# Altium PCB NSKPD.PcbDoc
Units mil, origin at the board's own origin, x right, y up, seen from the top; angles counter-clockwise.
Board outline 4921.26 x 1771.65 mil, 2 copper layers (Top Layer, Bottom Layer); 70 components, 100 nets, 280 pads, 59 vias.
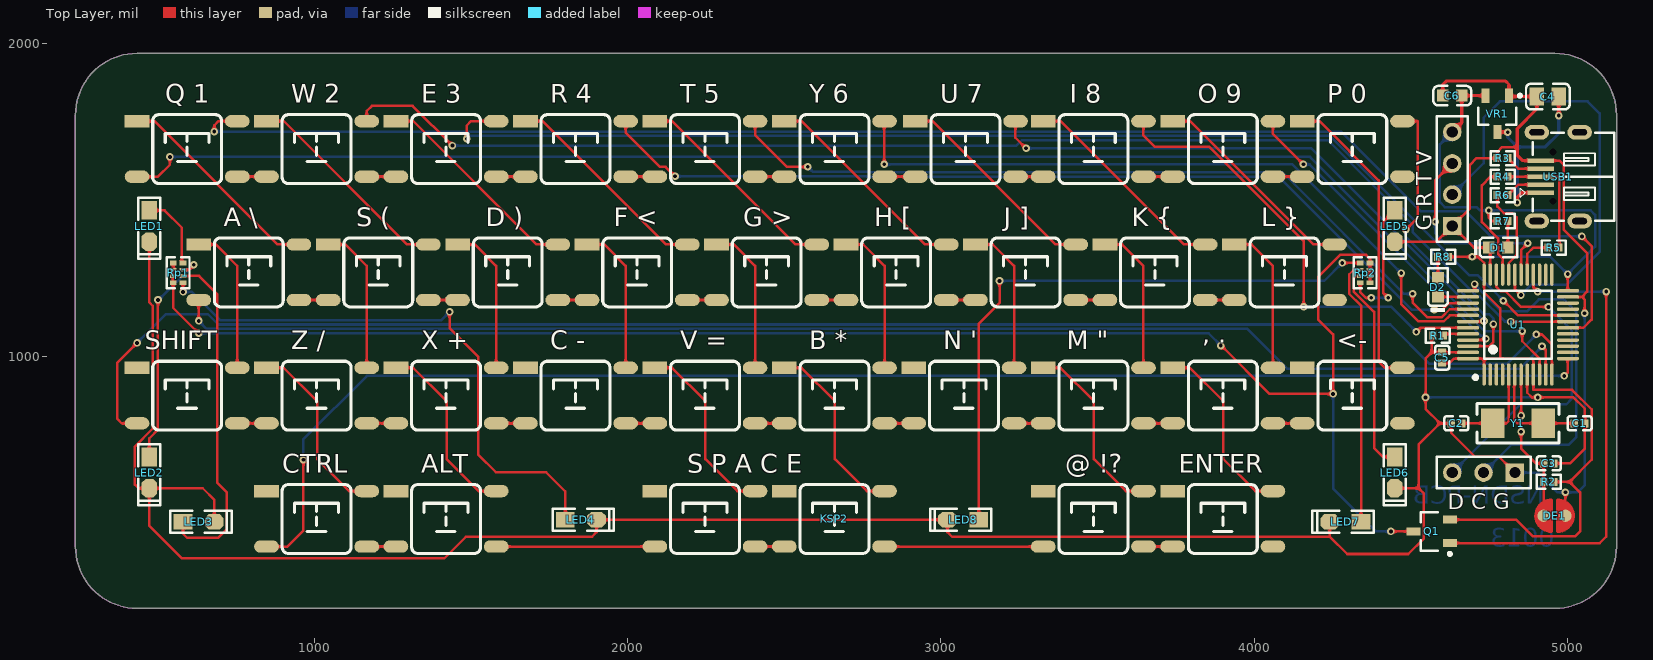
[diagram p0: Top Layer view]
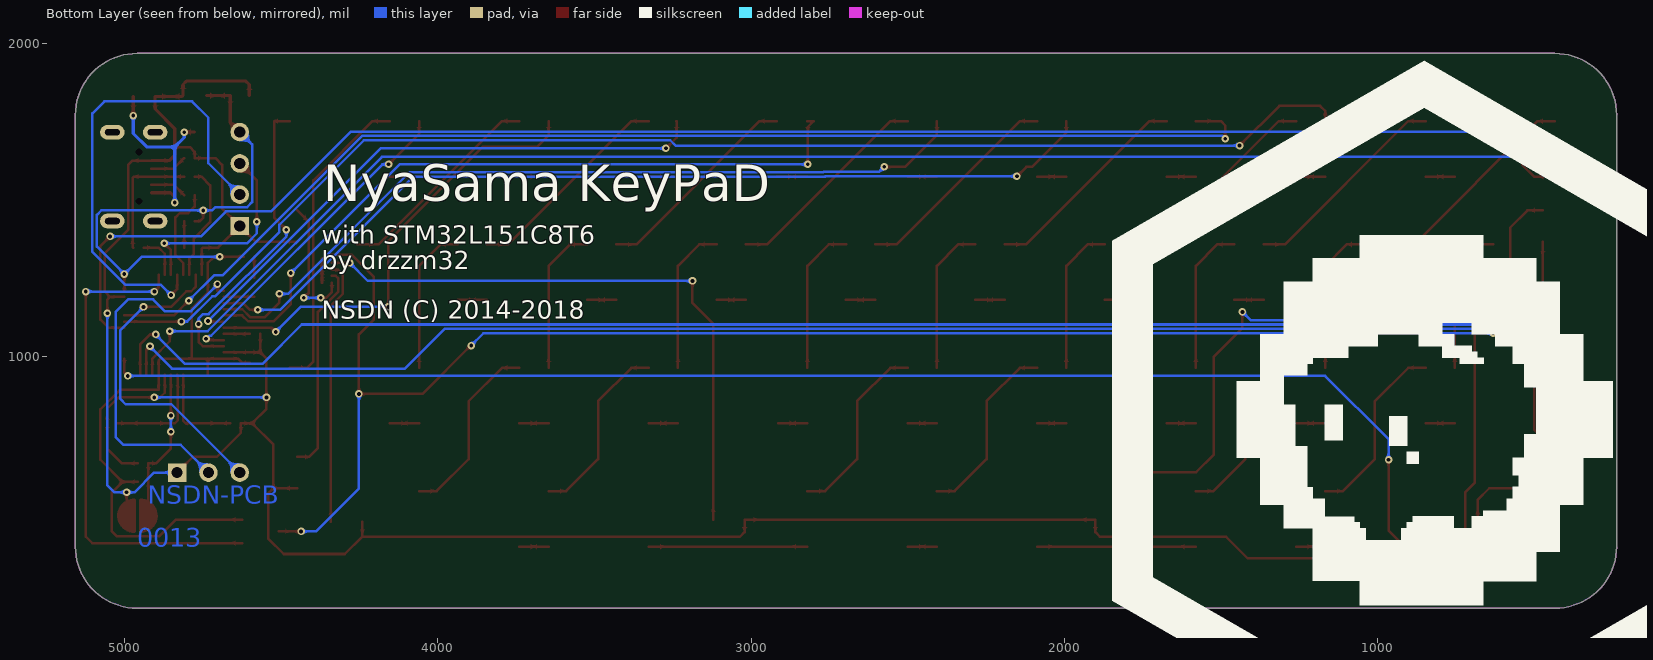
[diagram p1: Bottom Layer view, seen from below]
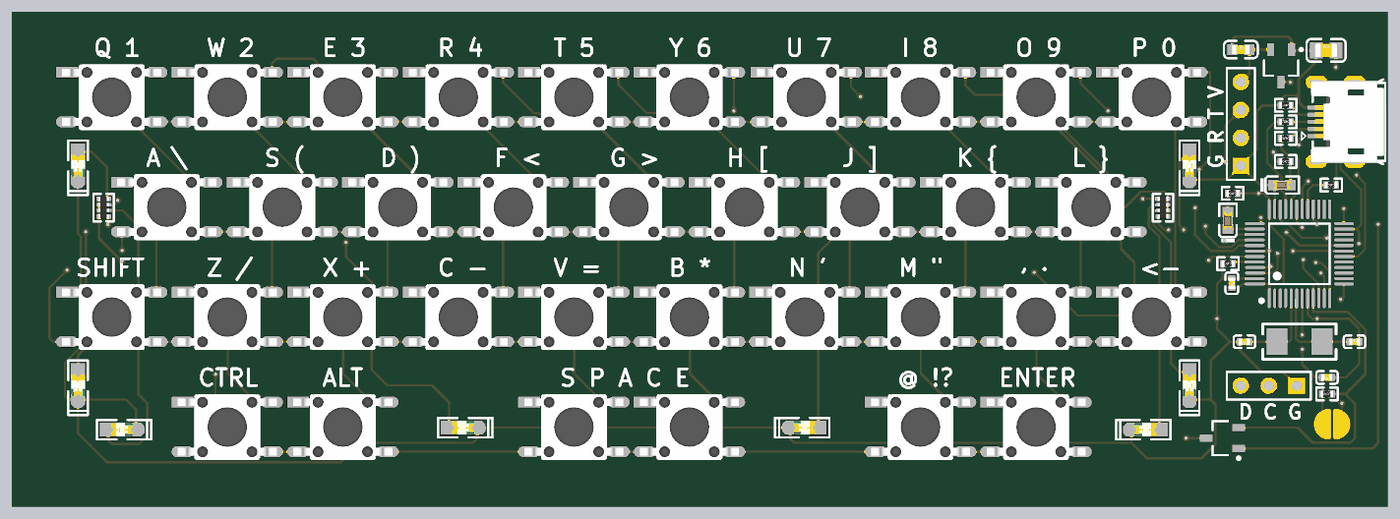
[diagram p2: 3D render of the assembled board from above, using the file's embedded part models]

## Layer stack, top to bottom
Top Solder: solder mask 0.4, Solder Resist, Dk 3.5
Top Layer: signal copper 1.4
Dielectric 1: dielectric 12.6, FR-4, Dk 4.8
Bottom Layer: signal copper 1.4
Bottom Solder: solder mask 0.4, Solder Resist, Dk 3.5

## Board outline
236.22,393.7 ccw(c433.07,393.7) 433.07,196.85 4960.63,196.85 ccw(c4960.63,393.7) 5157.48,393.7 5157.48,1771.65 ccw(c4960.63,1771.65) 4960.63,1968.5 433.07,1968.5 ccw(c433.07,1771.65) 236.22,1771.65

## Design rules (kind name [scope] priority, off if disabled: settings)
Clearance [All] p1: gap=6 ignorepadtopadclearanceinfootprint=FALSE
HoleSize [All] p1: absolutevalues=TRUE maxlimit=250 minlimit=11.81 maxpercent=80.000 minpercent=20.000
HoleToHoleClearance [All] p1: gap=18 allowstackedmicrovias=TRUE
MinimumSolderMaskSliver [All] p1: minsoldermaskwidth=6
PolygonConnect [All] p1: connectstyle=Relief reliefconductorwidth=10 reliefentries=4 polygonreliefangle="90 Angle" airgapwidth=10
RoutingTopology [All] p1: topology=Daisy_Balanced
RoutingVias [All] p1: holewidth=12 width=24 viastyle="Through Hole" minholewidth=11.81 minwidth=23.62 maxholewidth=250 maxwidth=261.81
SilkToSilkClearance [All] p1: silktosilkclearance=6
SilkToSolderMaskClearance [IsPad] p1: minsilkscreentomaskgap=6 clearancetoexposedcopper=TRUE
SolderMaskExpansion [All] p1: expansion=2
UnRoutedNet [All] p1: checkbadconnections=TRUE
Width [All] p1: maxlimit=20 minlimit=6 preferedwidth=8
23 further rules are at their usual default settings.

## Components (designator, comment, footprint, x,y, rotation, side; value= is the part's Value field where it differs from the comment)
", ." "6x6x5" "6*6*4.3 Small" 3900.16,875.57 r0 top (schematic designator KCOM)
<- "6x6x5" "6*6*4.3 Small" 4313.54,875.57 r0 top (schematic designator KBS)
"@ !?" "6x6x5" "6*6*4.3 Small" 3486.77,481.87 r0 top (schematic designator KFUN)
"A \" "6x6x5" "6*6*4.3 Small" 789.92,1269.27 r0 top (schematic designator KA)
ALT "6x6x5" "6*6*4.3 Small" 1419.84,481.87 r0 top (schematic designator KALT)
"B *" "6x6x5" "6*6*4.3 Small" 2660,875.57 r0 top (schematic designator KB)
C1 "20pF (200) 5% 50V" 0402_C 5039.37,787.4 r0 top
C2 "20pF (200) 5% 50V" 0402_C 4645.67,787.4 r180 top
C3 "100nF (104) 10% 16V" 0402_C 4940.94,659.45 r180 top
C4 "10uF (106) 10% 25V" 0805_C 4937.8,1830.71 r0 top
C5 "100nF (104) 10% 16V" 0402_C 4600.39,997.05 r270 top
C6 "10uF (106) 10% 10V" 0603_C 4632.68,1833.46 r0 top
"C -" "6x6x5" "6*6*4.3 Small" 1833.23,875.57 r0 top (schematic designator KC)
CTRL "6x6x5" "6*6*4.3 Small" 1006.46,481.87 r0 top (schematic designator KCTL)
D1 "绿灯 0603" 0603_LED_S1 4779.72,1348.43 r0 top
D2 "白灯 0603" 0603_LED_S1 4586.61,1221.26 r90 top
"D )" "6x6x5" "6*6*4.3 Small" 1616.69,1269.27 r0 top (schematic designator KD)
"D C G" "SWDIO" HDR1X3 4832.68,629.92 r180 top (schematic designator P1)
DE1 "NRST" DEBUG_A 4959.21,492.13 r0 top
"E 3" "6x6x5" "6*6*4.3 Small" 1419.84,1662.97 r0 top (schematic designator KE)
ENTER "6x6x5" "6*6*4.3 Small" 3900.16,481.87 r0 top (schematic designator KENT)
"F <" "6x6x5" "6*6*4.3 Small" 2030.08,1269.27 r0 top (schematic designator KF)
"G >" "6x6x5" "6*6*4.3 Small" 2443.46,1269.27 r0 top (schematic designator KG)
"G R T V" "USART1" HDR1X4 4632.68,1417.32 r90 top (schematic designator P2)
"H [" "6x6x5" "6*6*4.3 Small" 2856.85,1269.27 r0 top (schematic designator KH)
"I 8" "6x6x5" "6*6*4.3 Small" 3486.77,1662.97 r0 top (schematic designator KI)
"J ]" "6x6x5" "6*6*4.3 Small" 3270.24,1269.27 r0 top (schematic designator KJ)
"K {" "6x6x5" "6*6*4.3 Small" 3683.62,1269.27 r0 top (schematic designator KK)
KSP2 "6x6x5" "6*6*4.3 Small" 2660,481.87 r0 top
"L }" "6x6x5" "6*6*4.3 Small" 4097.01,1269.27 r0 top (schematic designator KL)
LED1 "侧发光" "LED 0805W" 472.44,1417.32 r270 top
LED2 "侧发光" "LED 0805W" 472.44,629.92 r270 top
LED3 "侧发光" "LED 0805W" 629.92,472.44 r0 top
LED4 "侧发光" "LED 0805W" 1850.39,479.53 r0 top
LED5 "侧发光" "LED 0805W" 4448.82,1417.32 r270 top
LED6 "侧发光" "LED 0805W" 4448.82,629.92 r270 top
LED7 "侧发光" "LED 0805W" 4291.34,472.44 r180 top
LED8 "侧发光" "LED 0805W" 3070.87,479.53 r180 top
"M \"" "6x6x5" "6*6*4.3 Small" 3486.77,875.57 r0 top (schematic designator KM)
"N '" "6x6x5" "6*6*4.3 Small" 3073.39,875.57 r0 top (schematic designator KN)
NSDN "Comment" NSDN 851.12,-354.33 r180 bottom locked
"O 9" "6x6x5" "6*6*4.3 Small" 3900.16,1662.97 r0 top (schematic designator KO)
"P 0" "6x6x5" "6*6*4.3 Small" 4313.54,1662.97 r0 top (schematic designator KP)
Q1 "AO3401A P道沟 X13A15 SOT-23" SOT-23-3L 4566.93,442.13 r0 top
"Q 1" "6x6x5" "6*6*4.3 Small" 593.07,1662.97 r0 top (schematic designator KQ)
R1 "100KΩ (1003) ±1%" 0402_R 4586.61,1066.93 r180 top
R2 "100KΩ (1003) ±1%" 0402_R 4940.94,600.39 r0 top
R3 "100KΩ (1003) ±1%" 0402_R 4793.31,1633.86 r180 top
R4 "22Ω (22R0) ±1%" 0402_R 4793.31,1574.8 r180 top
R5 "1.5KΩ (1501) ±1%" 0402_R 4956.1,1348.43 r180 top
R6 "22Ω (22R0) ±1%" 0402_R 4793.31,1515.75 r180 top
R7 "1KΩ (1001) ±1%" 0402_R 4793.31,1433.07 r0 top
R8 "1KΩ (1001) ±1%" 0402_R 4603.35,1318.9 r0 top
"R 4" "6x6x5" "6*6*4.3 Small" 1833.23,1662.97 r0 top (schematic designator KR)
Rp1 "1KΩ (102) ±5%" 0402_Rx4 564.17,1267.72 r270 top
Rp2 "1KΩ (102) ±5%" 0402_Rx4 4354.33,1267.72 r90 top
"S (" "6x6x5" "6*6*4.3 Small" 1203.31,1269.27 r0 top (schematic designator KS)
"S P A C E" "6x6x5" "6*6*4.3 Small" 2246.61,481.87 r0 top (schematic designator KSP1)
SHIFT "6x6x5" "6*6*4.3 Small" 593.07,875.57 r0 top (schematic designator KSFT)
"T 5" "6x6x5" "6*6*4.3 Small" 2246.61,1662.97 r0 top (schematic designator KT)
U1 "STM32L151C8T6" LQFP-48_7x7x05P 4842.52,1102.36 r0 top
"U 7" "6x6x5" "6*6*4.3 Small" 3078.43,1662.97 r0 top (schematic designator KU)
USB1 "USB-5P" USB-MICRO_D 5039.37,1574.8 r90 top
"V =" "6x6x5" "6*6*4.3 Small" 2246.61,875.57 r0 top (schematic designator KV)
VR1 "XC6206P332MR" SOT-23-3L 4776.57,1775.39 r90 top
"W 2" "6x6x5" "6*6*4.3 Small" 1006.46,1662.97 r0 top (schematic designator KW)
"X +" "6x6x5" "6*6*4.3 Small" 1419.84,875.57 r0 top (schematic designator KX)
Y1 "8MHz ±20ppm 20pF" SMD-5032_2P 4842.52,787.4 r0 top
"Y 6" "6x6x5" "6*6*4.3 Small" 2660,1662.97 r0 top (schematic designator KY)
"Z /" "6x6x5" "6*6*4.3 Small" 1006.46,875.57 r0 top (schematic designator KZ)

## Footprints (in the part's own frame and the unit in brackets; to place one, negate y for a bottom-side part, rotate by r counter-clockwise, add the part's x,y. Pads: shape width x height; smd on the part's side, far side on the other; paste and mask are expansions set on the pad)
"6*6*4.3 Small" [mm] "6*6*4.3mm"
  rect 2x1 smd: 1(-4.064,2.261)
  oval 2x1 smd: 2(-4.064,-2.239) 3(4.064,-2.239) 4(4.064,2.261)
  silkscreen extent -2.79,-2.79 2.79,2.79, body extent -4.5,-3 4.5,3, height 4.25
0402_C [mm]
  rect 0.6x0.65 smd mask+0.051: 1(-0.425,0) 2(0.425,0)
  silkscreen extent -0.98,-0.58 0.98,0.58, body extent -0.48,-0.3 0.52,0.3, height 0.2
0402_R [mm]
  rect 0.6x0.65 smd mask+0.051: 1(-0.425,0) 2(0.425,0)
  silkscreen extent -0.98,-0.57 0.97,0.58, body extent -0.57,-0.27 0.58,0.28, height 0.41
0402_Rx4 [mm]
  rect 0.4x0.55 smd mask+0.051: 1(-0.8,-0.4) 4(0.8,-0.4) 5(0.8,0.4) 8(-0.8,0.4)
  rect 0.3x0.55 smd mask+0.051: 2(-0.25,-0.4) 3(0.25,-0.4) 6(0.25,0.4) 7(-0.25,0.4)
  silkscreen extent -1.25,-0.92 1.25,0.92, body extent -1,-0.5 1,0.5, height 0.45
0603_C [mm]
  rect 0.93x0.98 smd: 1(-0.77,0) 2(0.77,0)
  silkscreen extent -1.54,-0.79 1.54,0.79, body extent -0.8,-0.4 0.8,0.4, height 0.3
0603_LED_S1 [mm]
  rect 0.93x0.98 smd: A(0.77,0) K(-0.77,0)
  silkscreen extent -1.98,-0.79 1.54,0.79, body extent -0.8,-0.4 0.8,0.4, height 0.6
0805_C [mm]
  rect 1.16x1.47 smd: 1(-0.89,0) 2(0.89,0)
  silkscreen extent -1.77,-1.04 1.77,1.04, body extent -1,-0.62 1,0.63, height 0.77
DEBUG_A [mm] "调试断点焊盘"
  round 1 smd paste-1: 1(-0.889,0) 2(0.889,0)
  Top Layer region: -0.254,1.27 -0.254,-1.27 -0.762,-1.143 -1.397,-0.508 -1.524,0.254 -1.27,0.762 -1.016,1.016 -0.508,1.27
  Top Layer region: 0.254,1.27 0.254,-1.27 0.762,-1.143 1.397,-0.508 1.524,0.254 1.27,0.762 1.016,1.016 0.508,1.27
  Top Layer lines w0.254: -0.889,1.1 cw(c-0.254,0) -0.254,1.27 -0.254,-1.27 cw(c-0.254,0) -0.889,1.1 ; 0.254,-1.27 ccw(c0.254,0) 1.086,0.96 ccw(c0.254,0) 0.889,1.1 ccw(c0.254,0) 0.563,1.232 ccw(c0.254,0) 0.254,1.27 0.254,-1.27
HDR1X3 [mm] "Connector; Header; 3 Position"
  rect 1.5x1.5 hole 0.9: 1(0,0)
  round 1.5 hole 0.9: 2(2.54,0) 3(5.08,0)
  silkscreen extent -1.27,-1.27 6.35,1.27
HDR1X4 [mm] "Connector; Header; 4 Position"
  rect 1.5x1.5 hole 0.9: 1(0,0)
  round 1.5 hole 0.9: 2(2.54,0) 3(5.08,0) 4(7.62,0)
  silkscreen extent -1.27,-1.27 8.89,1.27
"LED 0805W" [mil] "白色0805LED"
  rect 60x50 smd: 1(-50,0)
  oct 60x50 smd: 2(50,0)
  silkscreen extent -90,-35 105,35, body extent -39,-25 39,25, height 32
LQFP-48_7x7x05P [mm]
  oval 0.28x1.8 smd mask+0.051: 1(-2.75,-4.05) 2(-2.25,-4.05) 3(-1.75,-4.05) 4(-1.25,-4.05) 5(-0.75,-4.05) 6(-0.25,-4.05) 7(0.25,-4.05) 8(0.75,-4.05) 9(1.25,-4.05) 10(1.75,-4.05) 11(2.25,-4.05) 12(2.75,-4.05) 25(2.75,4.05) 26(2.25,4.05) 27(1.75,4.05) 28(1.25,4.05) 29(0.75,4.05) 30(0.25,4.05) 31(-0.25,4.05) 32(-0.75,4.05) 33(-1.25,4.05) 34(-1.75,4.05) 35(-2.25,4.05) 36(-2.75,4.05)
  oval 1.8x0.28 smd mask+0.051: 13(4.05,-2.75) 14(4.05,-2.25) 15(4.05,-1.75) 16(4.05,-1.25) 17(4.05,-0.75) 18(4.05,-0.25) 19(4.05,0.25) 20(4.05,0.75) 21(4.05,1.25) 22(4.05,1.75) 23(4.05,2.25) 24(4.05,2.75) 37(-4.05,2.75) 38(-4.05,2.25) 39(-4.05,1.75) 40(-4.05,1.25) 41(-4.05,0.75) 42(-4.05,0.25) 43(-4.05,-0.25) 44(-4.05,-0.75) 45(-4.05,-1.25) 46(-4.05,-1.75) 47(-4.05,-2.25) 48(-4.05,-2.75)
  silkscreen extent -3.6,-4.42 2.75,2.75
NSDN [mil]
  silkscreen extent -996,0 996,2300
SMD-5032_2P [mm]
  rect 1.9x2.4 smd: 1(-2.05,0) 2(2.05,0)
  silkscreen extent -3.33,-1.6 3.33,1.6
SOT-23-3L [mm] "http://www.aosmd.com/res/packaging_information/SOT-23-3L.pdf"
  rect 1.15x0.65 smd: 1(1.475,-0.95) 2(1.475,0.95) 3(-1.475,0)
  silkscreen extent -0.9,-1.95 1.6,1.55, body extent -0.9,-1.55 0.9,1.55, height 1.25
USB-MICRO_D [mm] "micro型USB ，6.7*7.5*2.5mm"
  oval 1.2x2 hole 0.5 slot 1.2 at 90 deg: 0(-3.6,0) 0(-3.6,3.47) 0(3.6,0) 0(3.6,3.47)
  round 0 hole 0.55 unplated: 0(-2,2.17) 0(2,2.17)
  rect 0.381x2.15 smd: 1(-1.3,3.16) 2(-0.65,3.16) 3(0,3.16) 4(0.65,3.16) 5(1.3,3.16)
  silkscreen extent -3.56,-2.79 3.56,4.81, body extent -3.99,-2.75 3.99,3.95, height 2.79

## Part data
", ." <- "@ !?" "A \" ALT "B *" "C -" CTRL "D )" "E 3" ENTER "F <" "G >" "H [" "I 8" "J ]" "K {" KSP2 "L }" "M \"" "N '" "O 9" "P 0" "Q 1" "R 4" "S (" "S P A C E" SHIFT "T 5" "U 7" "V =" "W 2" "X +" "Y 6" "Z /": library part "TSW SMD-6x6", "贴片6x6轻触开关", BOM名称=贴片6, 学习资源=www.oooc
C1 C2: library part "0402 20pF (200) 5% 50V", "贴片电容", Package=0402, SuppliersPartNumber=C1554, ComponentLink1Description=供应, ComponentLink1URL=http://www.szlcsc.com/product/details_1906.html, Supplier=LC
C3 C5: library part "0402 100nF (104) 10% 16V", "贴片电容", Package=0402, SuppliersPartNumber=C1525, ComponentLink1Description=供应, ComponentLink1URL=http://www.szlcsc.com/product/details_1877.html, Supplier=LC
C4: library part "0805 10uF (106) 10% 25V", "贴片电容", Package=0805, SuppliersPartNumber=C15850, ComponentLink1Description=供应, ComponentLink1URL=http://www.szlcsc.com/product/details_16532.html, Supplier=LC
C6: library part "0603 10uF (106) 10% 10V", "贴片电容", Package=0603, SuppliersPartNumber=C19702, ComponentLink1Description=供应, ComponentLink1URL=http://www.szlcsc.com/product/details_20411.html, Supplier=LC
D1: library part "0603 绿灯", "发光二极管", Package=0603, SuppliersPartNumber=C72043, ComponentLink1Description=供应, ComponentLink1URL=http://www.szlcsc.com/product/details_73152.html, Supplier=LC
D2: library part "0603 白灯", "发光二极管", Package=0603, SuppliersPartNumber=C2290, ComponentLink1Description=供应, ComponentLink1URL=http://www.szlcsc.com/product/details_2663.html, Supplier=LC
"D C G": library part "Header 3", "Header, 3-Pin", LatestRevisionDate=17-Jul-2002, LatestRevisionNote="Re-released for DXP Platform.", Publisher="Altium Limited"
DE1: library part DEBUG, "调试断点焊盘"
"G R T V": library part "Header 4", "Header, 4-Pin", LatestRevisionDate=17-Jul-2002, LatestRevisionNote="Re-released for DXP Platform.", Publisher="Altium Limited"
LED1 LED2 LED3 LED4 LED5 LED6 LED7 LED8: library part LED-SMD, "贴片LED", BOM名称=Ì, 学习资源=www.oooc
Q1: "MOS(场效应管)", Package=SOT-23, SuppliersPartNumber=C15127, ComponentLink1Description=供应, ComponentLink1URL=http://www.szlcsc.com/product/details_15801.html, Supplier=LC
R1 R2 R3: library part "0402 100KΩ (1003) 1%", "贴片电阻", Package=0402, SuppliersPartNumber=C25741, ComponentLink1Description=供应, ComponentLink1URL=http://www.szlcsc.com/product/details_26484.html, Supplier=LC
R4 R6: library part "0402 22Ω (22R0) 1%", "贴片电阻", Package=0402, SuppliersPartNumber=C25092, ComponentLink1Description=供应, ComponentLink1URL=http://www.szlcsc.com/product/details_25835.html, Supplier=LC
R5: library part "0402 1.5KΩ (1501) 1%", "贴片电阻", Package=0402, SuppliersPartNumber=C25867, ComponentLink1Description=供应, ComponentLink1URL=http://www.szlcsc.com/product/details_26610.html, Supplier=LC
R7 R8: library part "0402 1KΩ (1001) 1%", "贴片电阻", Package=0402, SuppliersPartNumber=C11702, ComponentLink1Description=供应, ComponentLink1URL=http://www.szlcsc.com/product/details_12256.html, Supplier=LC
Rp1 Rp2: library part "0402*4 1KΩ (102) 5%", "贴片排阻", Package=0402*4, SuppliersPartNumber=C25726, ComponentLink1Description=供应, ComponentLink1URL=http://www.szlcsc.com/product/details_26469.html, Supplier=LC
U1: "ARM", Package=LQFP-48_7x7x05P, SuppliersPartNumber=C9861, ComponentLink1Description=供应, ComponentLink1URL=http://www.szlcsc.com/product/details_10393.html, Supplier=LC
USB1: "微型USB母座", BOM名称=Î¢Ð, 学习资源=www.oooc
VR1: library part "SOT-23 XC6206P332MR", "低压差线性稳压(LDO)", Package=SOT-23, SuppliersPartNumber=C5446, ComponentLink1Description=供应, ComponentLink1URL=http://www.szlcsc.com/product/details_5896.html, Supplier=LC
Y1: library part "SMD-5032_2P 8MHz 20ppm 20pF", "贴片晶振", Package=SMD-5032_2P, SuppliersPartNumber=C115962, ComponentLink1Description=供应, ComponentLink1URL=http://www.szlcsc.com/product/details_117214.html, Supplier=LC

## Via types
v1: diameter 24, hole 12, Top Layer to Bottom Layer, tented both sides, 59 vias

## Nets (pads, with @x,y where several pads share a name; then routed paths per layer and width w, separated by ;. In a path a pad name is that pad's centre, name@x,y a point inside that pad or via, vN(x,y) a via of type N, cw(c..) or ccw(c..) an arc to the next point about the centre after c; other vN are vias at no path point)
3V3: "G R T V.4" C5.2 C6.2 Q1.2 R2.2 R7.1 R8.2 U1.1 U1.9 U1.24 U1.36 U1.48 VR1.2 | length 3704.1
  Top Layer w8: C5.2 4624.45,980.31 4638.23,994.09 U1.48 4734.25,994.09 ; R8.2 4645.18,1318.9 ; Q1.2 4836.47,479.53 4890,426 5025,426 5041,442 5041,566.68 5007.28,600.39 ; v1(4696.85,1318.9) 4645.18,1318.9 ; U1.1 4734.25,994.09 ; v1(4749.54,1467) 4749.54,1443.38 4759.84,1433.07 R7.1 ; R2.2 5007.28,600.39 ; v1(5001.22,1263.78) 5001.22,1211.38 U1.24 ; 4645.18,1318.9 4715.35,1318.9 4734.25,1300 U1.36 4734.25,1205.75 4786,1154 4786,995.5 4787.4,994.09 ; 4734.25,994.09 4787.4,994.09 ; 4787.4,994.09 4885.64,994.09 4891.73,988 U1.9 4891.73,895 4892.73,894 5015.56,894 5078,831.56 5078,671.11 5007.28,600.39
  Top Layer w10: 4632.68,1717.32 4662.99,1747.64 C6.2 VR1.2
  Bottom Layer w8: 4632.68,1717.32 4593,1677.64 4593,1493.61 4608.82,1477.79 4709.84,1477.79 4720.63,1467 v1(4749.54,1467) 5075,1467 5089,1453 5089,1351.56 v1(5001.22,1263.78) 4946.1,1318.9 v1(4696.85,1318.9)
A0: "Q 1.2" U1.10 | length 4855.9
  Top Layer w8: 433.07,1574.8 500,1574.8 538,1612.8 v1(538,1638) ; v1(4856.11,1081.3) 4856.11,1049.4 4911.42,994.09 U1.10
  Bottom Layer w8: v1(538,1638) 4178.89,1638 4735.58,1081.3 v1(4856.11,1081.3)
A1: "A \.2" U1.11 | length 4554.9
  Top Layer w8: v1(629.92,1114.17) 629.92,1174.18 623,1181.1 629.92,1181.1 ; v1(4919.21,1033.46) 4931.1,1021.57 U1.11
  Bottom Layer w8: v1(629.92,1114.17) 655.29,1088.8 3978.66,1088.8 4105.47,962 4849.1,962 4919.21,1032.11 v1(4919.21,1033.46)
A2: SHIFT.2 U1.12 | length 5107.9
  Top Layer w8: v1(433,1044) 370.08,981.08 370.08,801.32 384,787.4 SHIFT.2 ; v1(4901,1071) 4919.16,1071 4950.79,1039.37 U1.12
  Bottom Layer w8: v1(433,1044) 525.17,1136.17 658.99,1136.17 692.36,1102.8 4434.63,1102.8 4560.44,977 4807,977 v1(4901,1071)
A3: CTRL.2 U1.13 | length 4601.2
  Top Layer w8: CTRL.2 913.38,393.7 964.57,444.88 v1(964.57,671) ; v1(4990.25,938.75) 5001,949.5 5001,994.09 U1.13
  Bottom Layer w8: v1(964.57,671) 964.57,736.57 1166.75,938.75 v1(4990.25,938.75)
B0: "Q 1.4" U1.18 | length 4968.3
  Top Layer w8: v1(680,1719.01) 680,1739.06 692.91,1751.97 753.07,1751.97 ; U1.18 5051.2,1092.52 5077.4,1118.73 5077.4,1353.45 v1(5046.78,1384.07)
  Bottom Layer w8: v1(680,1719.01) 4277.99,1719.01 4533.21,1463.79 4677.21,1463.79 4756.93,1384.07 v1(5046.78,1384.07)
B1: "W 2.4" U1.19 | length 4188
  Top Layer w8: 1166.46,1751.97 1166.46,1784.57 1182.89,1801 1313,1801 v1(1440,1674) ; v1(4818.9,1112.2) U1.19
  Bottom Layer w8: v1(1440,1674) 3240.93,1674 3257.94,1691.01 4236.19,1691.01 4506,1421.2 4506,1397.77 4711.21,1192.56 4720.44,1192.56 4800.8,1112.2 v1(4818.9,1112.2)
B2: "E 3.4" U1.20 | length 3898.7
  Top Layer w8: v1(1486,1696) 1486,1737.97 1500,1751.97 1579.84,1751.97 ; v1(4795.5,1179) 4842.61,1131.89 U1.20
  Bottom Layer w8: v1(1486,1696) 1495.01,1705.01 4241.99,1705.01 4687.16,1259.84 4714.66,1259.84 v1(4795.5,1179)
B3: "R 4.4" U1.39 | length 2969.6
  Top Layer w8: 1993.23,1751.97 1993.23,1715.43 2102.36,1606.3 2120.7,1606.3 v1(2151,1576) ; v1(4574.8,1149.7) 4600.3,1149.7 4621.86,1171.26 U1.39
  Bottom Layer w8: v1(2151,1576) 2762.75,1576 2764.31,1574.44 4079.04,1574.44 4503.77,1149.7 v1(4574.8,1149.7)
B4: "T 5.4" U1.40 | length 2588.2
  Top Layer w8: 2406.61,1751.97 2406.61,1707.56 2507.87,1606.3 v1(2574.8,1606.3) ; v1(4506,1200.79) 4506,1173 4552.5,1126.5 4599.5,1126.5 4624.57,1151.57 U1.40
  Bottom Layer w8: v1(2574.8,1606.3) 2591.1,1590 2768.55,1590 2769.55,1589 4090,1589 4478.21,1200.79 v1(4506,1200.79)
B5: "Y 6.4" U1.41 | length 2303.4
  Top Layer w8: v1(2818.9,1614.17) 2818.9,1733.07 2800,1751.97 2820,1751.97 ; v1(4469.5,1267) 4469.5,1168.32 4525.32,1112.5 4605.61,1112.5 4625,1131.89 U1.41
  Bottom Layer w8: v1(2818.9,1614.17) 4122.33,1614.17 v1(4469.5,1267)
B6: "U 7.4" U1.42 | length 1843.4
  Top Layer w8: 3238.43,1751.97 3238,1751.97 3238,1699.01 v1(3271.65,1665.35) ; U1.42 4732.2,1112.2 v1(4734,1114)
  Bottom Layer w8: v1(3271.65,1665.35) 4182.65,1665.35 v1(4734,1114)
B7: "I 8.4" U1.43 | length 1470.4
  Top Layer w8: 3646.77,1751.97 3646.77,1706.73 3682.5,1671 3856.44,1671 4158,1369.44 v1(4158,1159) ; v1(4518,1079) 4531.52,1092.52 U1.43
  Bottom Layer w8: v1(4158,1159) 4438,1159 v1(4518,1079)
B8: "O 9.4" U1.45 | length 1050.3
  Top Layer w8: 4060.16,1751.97 4060.16,1711.5 v1(4157.48,1614.17) ; U1.45 4736.31,1053.15 v1(4740.16,1057)
  Bottom Layer w8: v1(4157.48,1614.17) 4176.83,1614.17 4723.7,1067.3 4729.85,1067.3 v1(4740.16,1057)
B9: "P 0.4" U1.46 | length 982.8
  Top Layer w8: 4473.54,1751.97 4522,1751.97 4523,1750.97 4523,1444 v1(4484,1405) ; U1.46 4750,1033.46 4764,1047.46 v1(4764,1104)
  Bottom Layer w8: v1(4484,1405) 4484,1383.8 4731.8,1136 4749.83,1136 4764,1121.83 v1(4764,1104)
BK_CTL: Q1.1 U1.28 | length 1568.7
  Top Layer w8: Q1.1 5103.72,404.72 5124,425 v1(5124,1208) ; U1.28 4891.73,1221.27 v1(4905,1208)
  Bottom Layer w8: v1(4905,1208) v1(5124,1208)
GND: "D C G.1" "G R T V.1" C1.2 C2.2 C3.1 C4.1 C5.1 C6.1 D1.K DE1.2 LED1.2 LED2.2 LED3.2 LED4.2 LED5.2 LED6.2 LED7.2 LED8.2 R1.2 R3.2 U1.8 U1.23 U1.35 U1.47 USB1.5 VR1.1 | length 10764
  Top Layer w8: LED1.2 472.44,1173.23 483,1162.67 483,770 426,713 426,591.92 438,579.92 LED2.2 ; LED3.2 679.92,543 643,579.92 LED2.2 ; LED7.2 4241.34,426.38 ; LED6.2 4525,579.92 ; LED5.2 4582.68,1367.32 4632.68,1417.32 ; R1.2@4566.93,1072.83 4566.93,1013.78 ; U1.47 C5.1 ; U1.35 4753.94,1343.9 D1.K 4701.57,1348.43 4632.68,1417.32 ; 4832.68,629.92 4782.68,679.92 4706.15,679.92 4628.94,757.14 C2.2 4593,787.4 ; 4840,1669.29 4791.63,1669.29 4776.57,1654.24 R3.2 4710.36,1633.86 4689,1612.5 4689,1473.64 4632.68,1417.32 ; U1.8 4872.05,884.95 4886.92,870.08 v1(4905.51,870.08) 5019.69,870.08 5056.1,833.66 C1.2 5056.1,706.55 5009,659.45 C3.1 ; USB1.5 4975.52,1625.98 4989,1612.5 4989,1405 5062.99,1331.01 5062.99,1207.59 5046.17,1190.77 ; DE1.2 4994.21,535.43 v1(4994.21,566.93) ; U1.23 5046,1190.77 ; 5046,1190.94 5046.17,1190.77 ; 5046.03,1190.77 5046.17,1190.77 ; v1(5055,1139) 5055,1181.94 5046.17,1190.77 ; LED2.2 472.44,459.56 576,356 1414,356 1483.2,425.2 1885.83,425.2 1900.39,439.76 LED4.2 LED8.2 3020.87,439.76 3035.43,425.2 4240.16,425.2 4241.34,426.38 ; 4241.34,426.38 4241.34,426.13 4297.46,370 4492.16,370 4542,419.84 4542,562.92 4525,579.92 ; 4525,579.92 4525,719.4 4593,787.4 ; 4566.93,1013.78 4547.24,994.1 v1(4547.24,870.08) 4547.24,833.16 4593,787.4 ; 4566.93,1013.78 C5.1 ; 4566.93,1013.78 C5.1
  Top Layer w10: C6.1 4602.36,1869.02 4613.35,1880 4802.99,1880 4813.98,1869.02 VR1.1 4816.73,1830.71 C4.1 4902.76,1791.02 4840,1728.27 4840,1669.29 4840,1643.5 4857.52,1625.98 USB1.5
  Bottom Layer w8: v1(4547.24,870.08) v1(4905.51,870.08) ; 4832.68,629.92 4906.22,629.92 4969.21,566.93 v1(4994.21,566.93) 5033.14,566.93 5055,588.79 v1(5055,1139)
NetC1_1: C1.1 U1.6 Y1.2 | length 343.1
  Top Layer w8: U1.6 4830.36,940.6 4830.36,797.04 4840,787.4 Y1.2 C1.1
NetC2_1: C2.1 U1.5 Y1.1 | length 301.8
  Top Layer w8: C2.1 Y1.1 4805.67,787.4 4812.99,794.72 U1.5
NetC3_2: C3.2 DE1.1 R2.1 U1.7 | length 495
  Top Layer w8: v1(4852.36,760.2) 4852.36,706.69 4899.61,659.45 C3.2 R2.1 4924.21,535.43 DE1.1 ; v1(4852.36,811.97) U1.7
  Bottom Layer w8: v1(4852.36,760.2) v1(4852.36,811.97)
NetD1_A: D1.A R7.2 | length 84.6
  Top Layer w8: D1.A R7.2
NetD2_A: D2.A R8.1 | length 67.3
  Top Layer w8: D2.A R8.1
NetKA_1: "A \.1" SHIFT.4 | length 477
  Top Layer w8: 629.92,1358.27 685.04,1358.27 753.07,1290.24 SHIFT.4
NetKA_3: "A \.3" "S (.2" | length 93.4
  Top Layer w8: 949.92,1181.1 1043.31,1181.1
NetKA_4: "A \.4" "Q 1.1" | length 679.9
  Top Layer w8: 433.07,1751.97 488.19,1751.97 881.89,1358.27 949.92,1358.27
NetKALT_2: ALT.2 CTRL.3 | length 93.4
  Top Layer w8: CTRL.3 ALT.2
NetKALT_3: "S P A C E.2" ALT.3 | length 506.8
  Top Layer w8: ALT.3 2086.61,393.7
NetKALT_4: "X +.1" ALT.4 | length 591.5
  Top Layer w8: 1259.84,964.57 1314.96,964.57 1421.26,858.27 1421.26,673.23 1523.62,570.87 ALT.4
NetKB_1: "B *.1" KSP2.4 | length 591.5
  Top Layer w8: 2500,964.57 2555.12,964.57 2661.42,858.27 2661.42,673.23 2763.78,570.87 KSP2.4
NetKB_2: "B *.2" "V =.3" | length 93.4
  Top Layer w8: 2406.61,787.4 2500,787.4
NetKB_3: "B *.3" "N '.2" | length 93.4
  Top Layer w8: 2820,787.4 2913.39,787.4
NetKB_4: "B *.4" "H [.1" | length 477
  Top Layer w8: 2696.85,1358.27 2751.97,1358.27 2820,1290.24 2820,964.57
NetKBS_2: ", ..3" <-.2 | length 93.4
  Top Layer w8: 4060.16,787.4 <-.2
NetKBS_4: "P 0.1" <-.4 | length 985.2
  Top Layer w8: 4153.54,1751.97 4208.66,1751.97 4397.64,1562.99 4397.64,984.25 4417.32,964.57 <-.4
NetKC_2: "C -.2" "X +.3" | length 93.4
  Top Layer w8: 1579.84,787.4 1673.23,787.4
NetKC_3: "C -.3" "V =.2" | length 93.4
  Top Layer w8: 1993.23,787.4 2086.61,787.4
NetKC_4: "C -.4" "F <.1" | length 477
  Top Layer w8: 1870.08,1358.27 1925.2,1358.27 1993.23,1290.24 1993.23,964.57
NetKCOM_1: ", ..1" ENTER.4 | length 591.5
  Top Layer w8: 3740,964.57 3740.16,964.57 3795.12,964.57 3901.42,858.27 3901.42,673.23 4003.78,570.87 ENTER.4@4060,570.87
NetKCOM_2: ", ..2" "M \".3" | length 93.4
  Top Layer w8: 3646.77,787.4 3740.16,787.4
NetKCOM_4: ", ..4" "L }.1" | length 477
  Top Layer w8: 3937.01,1358.27 3992.13,1358.27 4060.16,1290.24 4060.16,964.57
NetKCTL_4: "Z /.1" CTRL.4 | length 591.5
  Top Layer w8: 846.46,964.57 901.57,964.57 1007.87,858.27 1007.87,673.23 1110.24,570.87 CTRL.4
NetKD_1: "D ).1" "X +.4" | length 477
  Top Layer w8: 1456.69,1358.27 1511.81,1358.27 1579.84,1290.24 1579.84,964.57
NetKD_2: "D ).2" "S (.3" | length 93.4
  Top Layer w8: 1363.31,1181.1 1456.69,1181.1
NetKD_3: "D ).3" "F <.2" | length 93.4
  Top Layer w8: 1776.69,1181.1 1870.08,1181.1
NetKD_4: "D ).4" "E 3.1" | length 679.9
  Top Layer w8: 1259.84,1751.97 1314.96,1751.97 1708.66,1358.27 1776.69,1358.27
NetKE_2: "E 3.2" "W 2.3" | length 93.4
  Top Layer w8: 1166.46,1574.8 1259.84,1574.8
NetKE_3: "E 3.3" "R 4.2" | length 93.4
  Top Layer w8: 1579.84,1574.8 1673.23,1574.8
NetKENT_2: "@ !?.3" ENTER.2 | length 93.4
  Top Layer w8: 3646.77,393.7 ENTER.2
NetKF_3: "F <.3" "G >.2" | length 93.4
  Top Layer w8: 2190.08,1181.1 2283.46,1181.1
NetKF_4: "F <.4" "R 4.1" | length 679.9
  Top Layer w8: 1673.23,1751.97 1728.35,1751.97 2122.05,1358.27 2190.08,1358.27
NetKFUN_2: "@ !?.2" KSP2.3 | length 506.8
  Top Layer w8: KSP2.3 3326.77,393.7
NetKFUN_4: "@ !?.4" "M \".1" | length 591.5
  Top Layer w8: 3326.77,964.57 3381.89,964.57 3488.19,858.27 3488.19,673.23 3590.55,570.87 3646.77,570.87
NetKG_1: "G >.1" "V =.4" | length 477
  Top Layer w8: 2283.46,1358.27 2338.58,1358.27 2406.61,1290.24 2406.61,964.57
NetKG_3: "G >.3" "H [.2" | length 93.4
  Top Layer w8: 2603.46,1181.1 2696.85,1181.1
NetKG_4: "G >.4" "T 5.1" | length 679.9
  Top Layer w8: 2086.61,1751.97 2141.73,1751.97 2535.43,1358.27 2603.46,1358.27
NetKH_3: "H [.3" "J ].2" | length 93.4
  Top Layer w8: 3016.85,1181.1 3110.24,1181.1
NetKH_4: "H [.4" "Y 6.1" | length 679.9
  Top Layer w8: 2500,1751.97 2555.12,1751.97 2948.82,1358.27 3016.85,1358.27
NetKI_1: "I 8.1" "K {.4" | length 679.9
  Top Layer w8: 3326.77,1751.97 3381.89,1751.97 3775.59,1358.27 3843.62,1358.27
NetKI_2: "I 8.2" "U 7.3" | length 88.3
  Top Layer w8: 3238.43,1574.8 3326.77,1574.8
NetKI_3: "I 8.3" "O 9.2" | length 93.4
  Top Layer w8: 3646.77,1574.8 3740.16,1574.8
NetKJ_1: "J ].1" "N '.4" | length 477
  Top Layer w8: 3110.24,1358.27 3165.35,1358.27 3233.39,1290.24 3233.39,964.57
NetKJ_3: "J ].3" "K {.2" | length 93.4
  Top Layer w8: 3430.24,1181.1 3523.62,1181.1
NetKJ_4: "J ].4" "U 7.1" | length 674.9
  Top Layer w8: 2918.43,1751.97 2972.44,1751.97 3366.14,1358.27 3430.24,1358.27
NetKK_1: "K {.1" "M \".4" | length 477
  Top Layer w8: 3523.62,1358.27 3578.74,1358.27 3646.77,1290.24 3646.77,964.57
NetKK_3: "K {.3" "L }.2" | length 93.4
  Top Layer w8: 3843.62,1181.1 3937.01,1181.1
NetKL_4: "L }.4" "O 9.1" | length 679.9
  Top Layer w8: 3740.16,1751.97 3795.28,1751.97 4188.98,1358.27 4257.01,1358.27
NetKM_2: "M \".2" "N '.3" | length 93.4
  Top Layer w8: 3233.39,787.4 3326.77,787.4
NetKO_3: "O 9.3" "P 0.2" | length 93.4
  Top Layer w8: 4060.16,1574.8 4153.54,1574.8
NetKQ_3: "Q 1.3" "W 2.2" | length 93.4
  Top Layer w8: 753.07,1574.8 846.46,1574.8
NetKR_3: "R 4.3" "T 5.2" | length 93.4
  Top Layer w8: 1993.23,1574.8 2086.61,1574.8
NetKS_1: "S (.1" "Z /.4" | length 477
  Top Layer w8: 1043.31,1358.27 1098.43,1358.27 1166.46,1290.24 1166.46,964.57
NetKS_4: "S (.4" "W 2.1" | length 679.9
  Top Layer w8: 846.46,1751.97 901.57,1751.97 1295.28,1358.27 1363.31,1358.27
NetKSFT_3: "Z /.2" SHIFT.3 | length 93.4
  Top Layer w8: SHIFT.3 846.46,787.4
NetKSP1_3: "S P A C E.3" KSP2.2 | length 93.4
  Top Layer w8: 2406.61,393.7 KSP2.2
NetKSP1_4: "S P A C E.4" "V =.1" | length 591.5
  Top Layer w8: 2086.61,964.57 2141.73,964.57 2248.03,858.27 2248.03,673.23 2350.39,570.87 2406.61,570.87
NetKT_3: "T 5.3" "Y 6.2" | length 93.4
  Top Layer w8: 2406.61,1574.8 2500,1574.8
NetKU_2: "U 7.2" "Y 6.3" | length 98.4
  Top Layer w8: 2820,1574.8 2918.43,1574.8
NetKX_2: "X +.2" "Z /.3" | length 93.4
  Top Layer w8: 1166.46,787.4 1259.84,787.4
NetLED1_1: LED1.1 Rp1.8 | length 243.3
  Top Layer w8: LED1.1 520.87,1467.32 575.97,1412.22 575.97,1299.21 Rp1.8
NetLED2_1: LED2.1 Rp1.7 | length 714
  Top Layer w8: LED2.1 472.44,739.64 500,767.2 v1(500,1181.1) ; Rp1.7 598.43,1277.56 v1(614.17,1293.31)
  Bottom Layer w8: v1(500,1181.1) 501.97,1181.1 v1(614.17,1293.31)
NetLED3_1: LED3.1 Rp1.6 | length 1091.1
  Top Layer w8: LED3.1 579.92,434.76 593.42,421.26 691.26,421.26 720,450 720,567 689,598 689,1200 631.13,1257.87 Rp1.6
NetLED4_1: LED4.1 Rp1.5 | length 1838.9
  Top Layer w8: v1(579.92,1206.92) Rp1.5 ; v1(1431,1143) 1431,1091 1523,999 1523,686.76 1578.76,631 1739.08,631 1800.39,569.68 LED4.1
  Bottom Layer w8: v1(579.92,1206.92) 608.04,1206.92 698.16,1116.8 1404.8,1116.8 v1(1431,1143)
NetLED5_1: LED5.1 Rp2.8 | length 426.9
  Top Layer w8: Rp2.8 4338.58,1206.97 4357.55,1188 v1(4374.02,1188) ; v1(4428,1188) 4413,1203 4413,1431.5 LED5.1
  Bottom Layer w8: v1(4374.02,1188) v1(4428,1188)
NetLED6_1: LED6.1 Rp2.7 | length 669.8
  Top Layer w8: Rp2.7 4326,1257.87 4317.75,1249.63 4317.75,1208 4383,1142.75 4383,708.92 4412,679.92 LED6.1
NetLED7_1: LED7.1 Rp2.6 | length 847.2
  Top Layer w8: Rp2.6 4318,1277.56 4303.75,1263.31 4303.75,1200.58 4341.34,1163 LED7.1
NetLED8_1: LED8.1 Rp2.5 | length 1965.1
  Top Layer w8: LED8.1 3120.87,1105.87 3187,1172 v1(3187,1242) ; v1(4281.21,1299.21) Rp2.5
  Bottom Layer w8: v1(3187,1242) 4224,1242 v1(4281.21,1299.21)
NetQ1_3: Q1.3 Rp1.1 Rp1.2 Rp1.3 Rp1.4 Rp2.1 Rp2.2 Rp2.3 Rp2.4 | length 5339.6
  Top Layer w8: Rp1.1 Rp1.2 Rp1.3 Rp1.4 548.43,1156.3 v1(629.92,1074.8) ; v1(3893.7,1035.43) 3895.07,1035.43 4049.33,881.17 v1(4251.97,881.17) 4251.97,1071.31 4204,1119.28 4204,1254.16 4274.84,1325 4357.5,1325 ; v1(4437.01,442) 4437.13,442.13 Q1.3 ; 4357.5,1325 4357.58,1325 4370.08,1312.5 Rp2.4 Rp2.3 Rp2.2 Rp2.1 4370,1236.22 4370,1312.5 4357.5,1325
  Bottom Layer w8: v1(629.92,1074.8) 3854.33,1074.8 v1(3893.7,1035.43) ; v1(4251.97,881.17) 4251.97,579.8 4389.76,442 v1(4437.01,442)
NetR1_1: R1.1 U1.44 | length 82.7
  Top Layer w8: R1.1@4600.39,1072.83 U1.44
NetR3_1: R3.1 USB1.4 | length 118.8
  Top Layer w8: R3.1 4843.5,1600.39 USB1.4
NetR4_1: R4.1 R5.1 USB1.3 | length 389.1
  Top Layer w8: R4.1 USB1.3 4969.96,1574.8 4974.76,1570 4974.76,1350.35 R5.1
NetR6_1: R6.1 USB1.2 | length 118.8
  Top Layer w8: R6.1 4843.5,1549.21 USB1.2
SWD_CLK: "D C G.2" U1.37 | length 1178.1
  Top Layer w8: U1.37 4704,1210.63 v1(4704,1232)
  Bottom Layer w8: v1(4704,1232) 4704,1230 4788.26,1145.74 4872.47,1145.74 4909.51,1182.79 4989.21,1182.79 5028,1144 5028,742.5 5003.74,718.24 4821,718.24 4732.68,629.92
SWD_DIO: "D C G.3" U1.34 | length 1035.1
  Top Layer w8: U1.34 4773.62,1222.88 4787.5,1209 4802.81,1209 4852.81,1159 v1(4940,1159)
  Bottom Layer w8: 4632.68,629.92 4850.83,848.08 4997.08,848.08 5014,865 5014,1085 v1(4940,1159)
SYS_LED: D2.K U1.38 | length 96.5
  Top Layer w8: D2.K U1.38
U5V: C4.2 USB1.1 VR1.3 | length 637.5
  Top Layer w10: VR1.3 4809.21,1717.32 v1(4810,1716.54) ; v1(4840,1492.13) 4840,1510 4853.62,1523.62 USB1.1 ; v1(4972.83,1770) C4.2
  Bottom Layer w10: v1(4810,1716.54) 4810,1700 4840,1670 ; v1(4840,1492.13) 4840,1670 ; v1(4972.83,1770) 4972.83,1712.83 4930,1670 4840,1670
USART1_RX: "G R T V.2" U1.31 | length 1518.3
  Top Layer w8: U1.31 4832.68,1216 v1(4852,1196.68)
  Bottom Layer w8: 4632.68,1517.32 4733,1617.64 4733,1763 4785,1815 5065,1815 5103,1777 5103,1334.45 4998.55,1230 4885.32,1230 v1(4852,1196.68)
USART1_TX: "G R T V.3" U1.30 | length 664.3
  Top Layer w8: v1(4578,1431) 4578,1562.64 4632.68,1617.32 ; U1.30 4852.36,1340.36 v1(4874,1362)
  Bottom Layer w8: v1(4578,1431) 4578,1394.15 4610.15,1362 v1(4874,1362)
USB_DM: R6.2 U1.32 | length 306.1
  Top Layer w8: R6.2 4776.57,1479 4797.57,1458 4825,1458 4838.36,1444.64 4838.36,1324.39 4812.99,1299.02 U1.32
USB_DP: R4.2 U1.33 | length 373.7
  Top Layer w8: R4.2 4754.8,1574.8 4727,1547 4727,1429.5 4779,1377.5 4779,1327.31 4793.31,1313 U1.33
USB_PU: R5.2 U1.29 | length 142.4
  Top Layer w8: U1.29 4872.05,1328.74 4891.73,1348.43 R5.2
pads on no net: "@ !?.1" "C -.1" "L }.3" "N '.1" "P 0.3" "S P A C E.1" <-.1 <-.3 ALT.1 CTRL.1 ENTER.1 ENTER.3 KSP2.1 SHIFT.1 U1.2 U1.3 U1.4 U1.14 U1.15 U1.16 U1.17 U1.21 U1.22 U1.25 U1.26 U1.27 USB1.0

## Keep-outs
Keep-Out Layer:
  lines w1: 236.22,393.7 ccw(c433.07,393.7) 433.07,196.85 4960.63,196.85 ccw(c4960.63,393.7) 5157.48,393.7 5157.48,1771.65 ccw(c4960.63,1771.65) 4960.63,1968.5 433.07,1968.5 ccw(c433.07,1771.65) 236.22,1771.65 236.22,393.7

## Other copper
Bottom Layer:
  text "NSDN-PCB" at 4926.02,511.81 h100
  text "0013" at 4960.63,393.7 h60

## Silkscreen, mask and mechanical layers (free items; w line width, h text height)
Bottom Overlay:
  text "NyaSama KeyPaD" at 4366.82,1458.66 h200
  text "with STM32L151C8T6" at 4370.08,1340.75 h100
  text "by drzzm32" at 4370.08,1259.84 h100
  text "NSDN (C) 2014-2018" at 4370.08,1102.36 h100
Bottom Solder:
  text "NSDN-PCB" at 4926.02,511.81 h100
  text "0013" at 4960.63,393.7 h60